# EAGLE board SteuerPlatine (EAGLE 8.5.0)
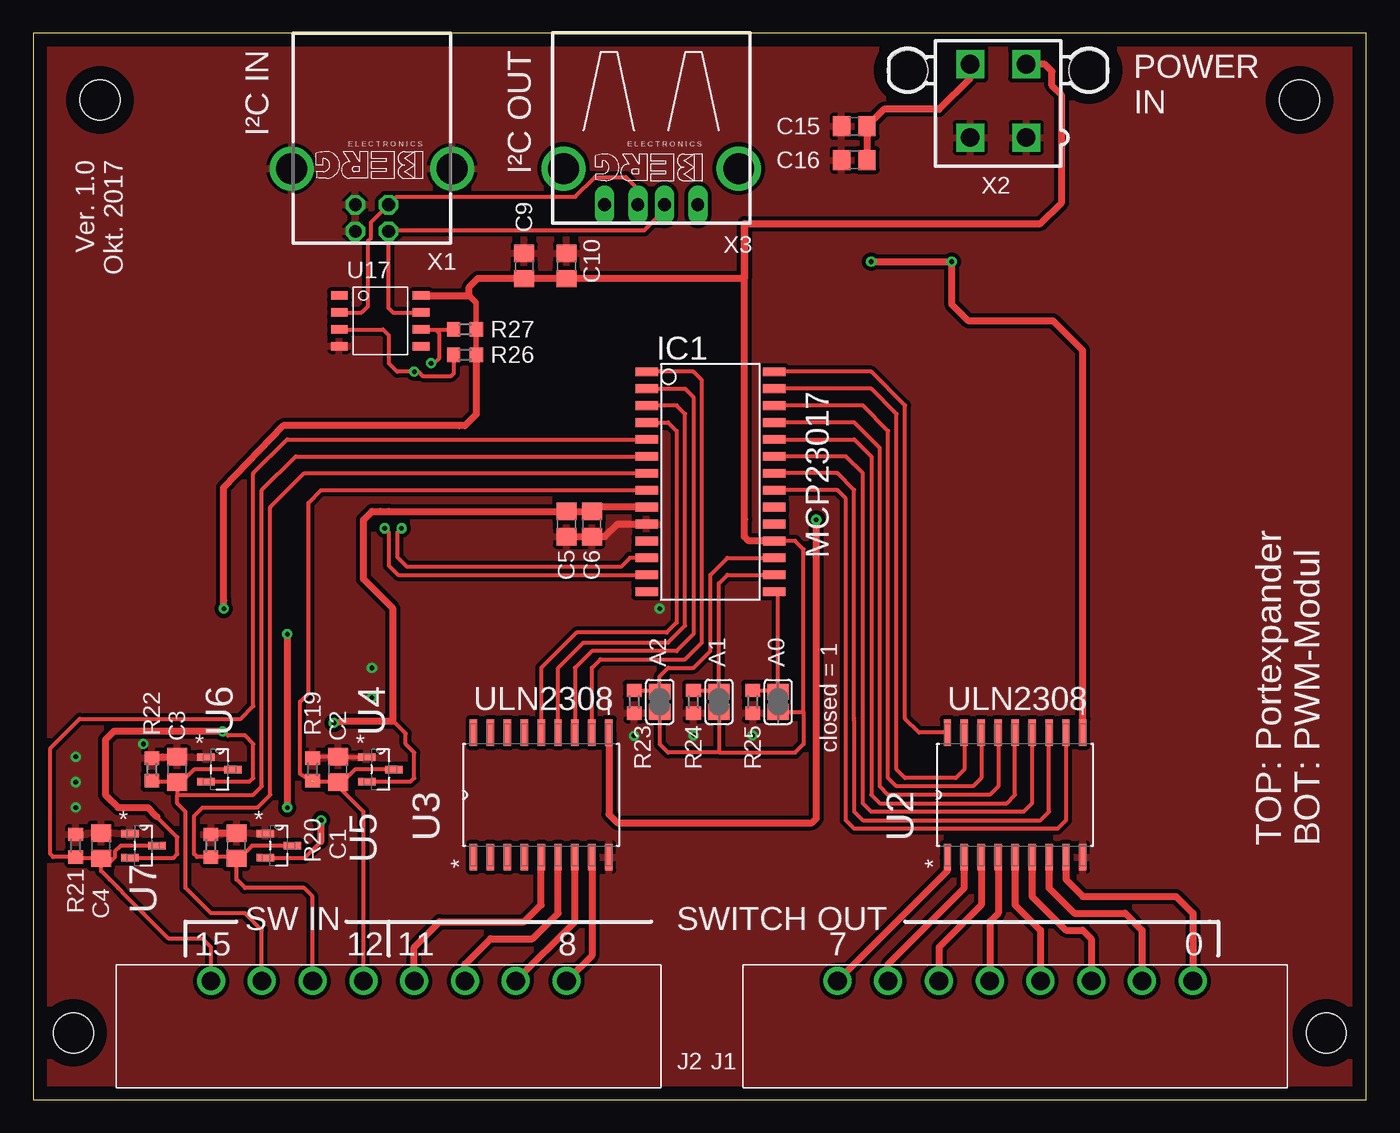
[diagram p0: board, top side]
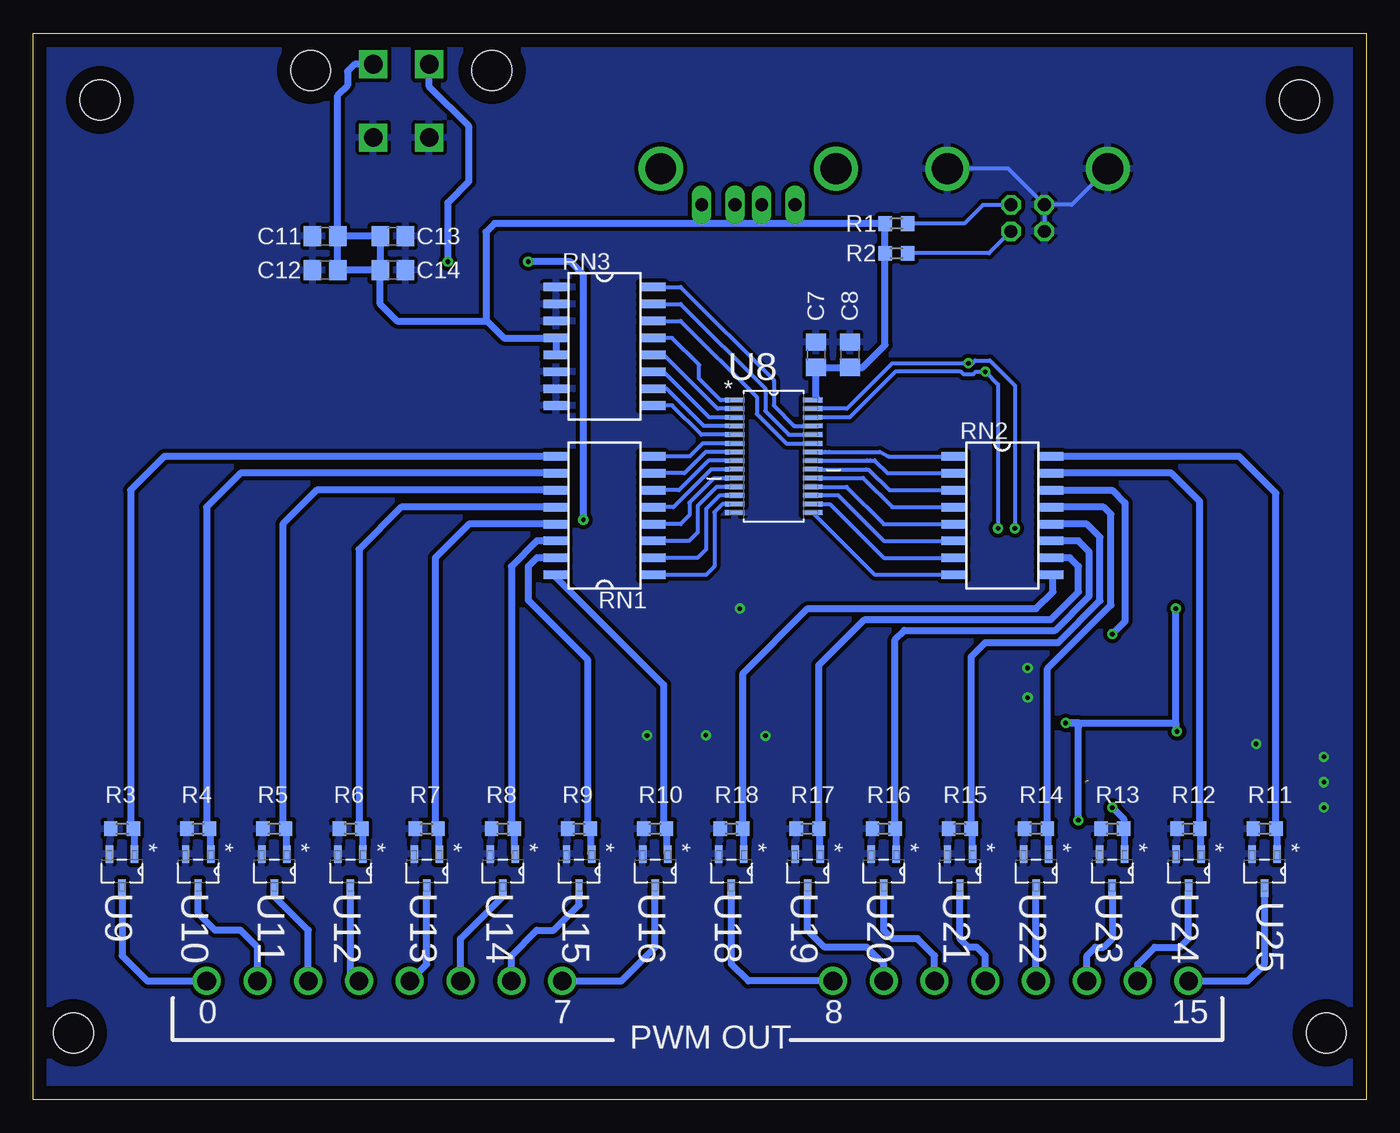
[diagram p1: board, bottom side, seen from below]

Size 100 x 80 mm. Coordinates in mm from the lower left corner, seen from the top.
Outline: 0,0 100,0 100,80 0,80 0,0
Copper layers (1*16): Top 0.035mm / dielectric 1.5mm / Bottom 0.035mm
Design rules "default *": minimum track width 6mil, minimum drill 0.35mm, track to track 12mil, track to pad 12mil, pad to pad 12mil, via to via 12mil, smd to smd 12mil, copper to edge 40mil, drill to drill 6mil, minimum pad ring 10mil, minimum via ring 8mil, stop-mask expansion 4mil, vias tented up to drill 0mil, thermal gap 10mil
Holes 3 mm at 5,75 3,5 95,75 97,5

## Footprints (pad centres in the part's own frame; a part is rotated, then mirrored left to right if it is on the bottom)
SJ = smd 1.168 x 1.6: 1 -0.762,0; 2 0.762,0
C0805 = smd 1.3 x 1.5: 1 -0.95,0; 2 0.95,0
SO28W = smd 0.65 x 1.7: 1 -7.62,-4.78; 2 -6.35,-4.78; 3 -5.08,-4.78; 4 -3.81,-4.78; 5 -2.54,-4.78; 6 -1.27,-4.78; 7 0,-4.78; 8 1.27,-4.78; 9 2.54,-4.78; 10 3.81,-4.78; 11 5.08,-4.78; 12 6.35,-4.78; 13 7.62,-4.78; 14 8.89,-4.78; 15 8.89,4.78; 16 7.62,4.78; 17 6.35,4.78; 18 5.08,4.78; 19 3.81,4.78; 20 2.54,4.78; 21 1.27,4.78; 22 0,4.78; 23 -1.27,4.78; 24 -2.54,4.78; 25 -3.81,4.78; 26 -5.08,4.78; 27 -6.35,4.78; 28 -7.62,4.78
691325310008 = drill 1.4: 1 -13.335,0; 2 -9.525,0; 3 -5.715,0; 4 -1.905,0; 5 1.905,0; 6 5.715,0; 7 9.525,0; 8 13.335,0
R0603 = smd 1 x 1.1: 1 -0.85,0; 2 0.85,0
SOMC16 = smd 1.91 x 0.64: 1 -3.62,4.445; 2 -3.62,3.175; 3 -3.62,1.905; 4 -3.62,0.635; 5 -3.62,-0.635; 6 -3.62,-1.905; 7 -3.62,-3.175; 8 -3.62,-4.445; 9 3.62,-4.445; 10 3.62,-3.175; 11 3.62,-1.905; 12 3.62,-0.635; 13 3.62,0.635; 14 3.62,1.905; 15 3.62,3.175; 16 3.62,4.445
SOIC127P1030X265-18N = smd 1.981 x 0.559: 1 -4.674,5.08; 2 -4.674,3.81; 3 -4.674,2.54; 4 -4.674,1.27; 5 -4.674,0; 6 -4.674,-1.27; 7 -4.674,-2.54; 8 -4.674,-3.81; 9 -4.674,-5.08; 10 4.674,-5.08; 11 4.674,-3.81; 12 4.674,-2.54; 13 4.674,-1.27; 14 4.674,0; 15 4.674,1.27; 16 4.674,2.54; 17 4.674,3.81; 18 4.674,5.08
SOT91P240X120-3N = smd 1.321 x 0.559: 1 -1.016,0.914; 2 -1.016,-0.914; 3 1.016,0
SOP65P640X110-28N = smd 1.473 x 0.356: 1 -2.921,4.216; 2 -2.921,3.581; 3 -2.921,2.921; 4 -2.921,2.286; 5 -2.921,1.626; 6 -2.921,0.965; 7 -2.921,0.33; 8 -2.921,-0.33; 9 -2.921,-0.965; 10 -2.921,-1.626; 11 -2.921,-2.286; 12 -2.921,-2.921; 13 -2.921,-3.581; 14 -2.921,-4.216; 15 2.921,-4.216; 16 2.921,-3.581; 17 2.921,-2.921; 18 2.921,-2.286; 19 2.921,-1.626; 20 2.921,-0.965; 21 2.921,-0.33; 22 2.921,0.33; 23 2.921,0.965; 24 2.921,1.626; 25 2.921,2.286; 26 2.921,2.921; 27 2.921,3.581; 28 2.921,4.216
SOT95P280X130-3N = smd 1.321 x 0.559: 1 -1.27,0.94; 2 -1.27,-0.94; 3 1.27,0
SOIC-8 = smd 1.27 x 0.635: 1 -3.073,1.905; 2 -3.073,0.635; 3 -3.073,-0.635; 4 -3.073,-1.905; 5 3.073,-1.905; 6 3.073,-0.635; 7 3.073,0.635; 8 3.073,1.905
PN61729-S = drill 0.95 octagon: 1 1.25,4.71; 2 -1.25,4.71; 3 -1.25,2.71; 4 1.25,2.71 | drill 2.3 pad 2.9: S1 -6.02,0; S2 6.02,0
5566-4 = drill 1.4 square: 1 2.1,-2.75; 2 -2.1,-2.75; 3 2.1,2.75; 4 -2.1,2.75 | hole 3: 6.8,2.29; -6.8,2.29
PN87520-S = drill 0.95 long: 1 -3.5,2.71; 2 -1,2.71; 3 1,2.71; 4 3.5,2.71 | drill 2.3 pad 2.9: S1 -6.57,0; S2 6.57,0

## Placement (x,y rotation side)
A0  [SJ]  55.88,29.84 270 top
A1  [SJ]  51.44,29.84 270 top
A2  [SJ]  46.99,29.84 270 top
C1  100nF  [C0805]  15.24,19.05 270 top
C2  100nF  [C0805]  22.86,24.77 270 top
C3  100nF  [C0805]  10.79,24.77 270 top
C4  100nF  [C0805]  5.08,19.05 270 top
C5  100nF  [C0805]  40.01,43.18 270 top
C6  10µF  [C0805]  41.91,43.18 270 top
C7  100nF  [C0805]  41.27,55.88 90 bottom
C8  10µF  [C0805]  38.73,55.88 90 bottom
C9  10µF  [C0805]  36.83,62.55 90 top
C10  100nF  [C0805]  40.01,62.55 90 top
C11  100nF  [C0805]  78.11,64.77 0 bottom
C12  100nF  [C0805]  78.11,62.23 0 bottom
C13  10µF  [C0805]  73.03,64.77 180 bottom
C14  10µF  [C0805]  73.03,62.23 180 bottom
C15  100nF  [C0805]  61.59,73.03 180 top
C16  10µF  [C0805]  61.59,70.48 180 top
IC1  MCP23017SO  [SO28W]  50.8,46.99 270 top
J1  [691325310008]  73.66,8.89 0 top
J2  [691325310008]  26.67,8.89 0 top
R1  [R0603]  35.24,65.72 0 bottom
R2  [R0603]  35.24,63.5 0 bottom
R3  [R0603]  93.34,20.32 0 bottom
R4  [R0603]  87.63,20.32 0 bottom
R5  [R0603]  81.92,20.32 0 bottom
R6  [R0603]  76.2,20.32 0 bottom
R7  [R0603]  70.48,20.32 0 bottom
R8  [R0603]  64.77,20.32 0 bottom
R9  [R0603]  59.05,20.32 0 bottom
R10  [R0603]  53.34,20.32 0 bottom
R11  [R0603]  7.62,20.32 0 bottom
R12  [R0603]  13.34,20.32 0 bottom
R13  [R0603]  19.05,20.32 0 bottom
R14  [R0603]  24.77,20.32 0 bottom
R15  [R0603]  30.48,20.32 0 bottom
R16  [R0603]  36.2,20.32 0 bottom
R17  [R0603]  41.91,20.32 0 bottom
R18  [R0603]  47.62,20.32 0 bottom
R19  3k  [R0603]  20.95,24.77 90 top
R20  3k  [R0603]  13.34,19.05 90 top
R21  3k  [R0603]  3.17,19.05 90 top
R22  3k  [R0603]  8.89,24.77 90 top
R23  3k  [R0603]  45.09,29.84 90 top
R24  3k  [R0603]  49.53,29.84 90 top
R25  3k  [R0603]  53.98,29.84 90 top
R26  [R0603]  32.38,55.88 0 top
R27  [R0603]  32.38,57.78 0 top
RN1  [SOMC16]  57.15,43.81 180 bottom
RN2  [SOMC16]  27.3,43.81 0 bottom
RN3  [SOMC16]  57.15,56.52 0 bottom
U2  ULN2803ADW  [SOIC127P1030X265-18N]  73.66,22.86 90 top
U3  ULN2803ADW  [SOIC127P1030X265-18N]  38.1,22.86 90 top
U4  BAV99  [SOT91P240X120-3N]  26.04,24.77 0 top
U5  BAV99  [SOT91P240X120-3N]  18.41,19.05 0 top
U6  BAV99  [SOT91P240X120-3N]  13.97,24.77 0 top
U7  BAV99  [SOT91P240X120-3N]  8.26,19.05 0 top
U8  PCA9635PW  [SOP65P640X110-28N]  44.45,48.26 0 bottom
U9  TSM2306CX  [SOT95P280X130-3N]  93.34,17.14 270 bottom
U10  TSM2306CX  [SOT95P280X130-3N]  87.63,17.14 270 bottom
U11  TSM2306CX  [SOT95P280X130-3N]  81.92,17.14 270 bottom
U12  TSM2306CX  [SOT95P280X130-3N]  76.2,17.14 270 bottom
U13  TSM2306CX  [SOT95P280X130-3N]  70.48,17.14 270 bottom
U14  TSM2306CX  [SOT95P280X130-3N]  64.77,17.14 270 bottom
U15  TSM2306CX  [SOT95P280X130-3N]  59.05,17.14 270 bottom
U16  TSM2306CX  [SOT95P280X130-3N]  53.34,17.14 270 bottom
U17  P82B715TD  [SOIC-8]  26.04,58.42 0 top
U18  TSM2306CX  [SOT95P280X130-3N]  47.62,17.14 270 bottom
U19  TSM2306CX  [SOT95P280X130-3N]  41.91,17.14 270 bottom
U20  TSM2306CX  [SOT95P280X130-3N]  36.2,17.14 270 bottom
U21  TSM2306CX  [SOT95P280X130-3N]  30.48,17.14 270 bottom
U22  TSM2306CX  [SOT95P280X130-3N]  24.77,17.14 270 bottom
U23  TSM2306CX  [SOT95P280X130-3N]  19.05,17.14 270 bottom
U24  TSM2306CX  [SOT95P280X130-3N]  13.34,17.14 270 bottom
U25  TSM2306CX  [SOT95P280X130-3N]  7.62,17.14 270 bottom
X1  PN61729-S  [PN61729-S]  25.4,69.85 180 top
X2  5566-4  [5566-4]  72.39,74.93 0 top
X3  PN87520-S  [PN87520-S]  46.35,69.85 180 top

## Library data of the parts
A0 A1 A2 = jumper
C1-C16 R1-R27 = resistor
IC1 = microchip; MF: MICROCHIP; MPN: MCP23017-E/SO; OC_FARNELL: 1332087; OC_NEWARK: 31K2958
J1 J2 = WR-TBL
RN1-RN3 = resistor-dil; OC_FARNELL: unknown; OC_NEWARK: unknown
U2 U3 = Texas Instruments_Farnell; MPN: ULN2803ADW; OC_FARNELL: 1652419; OC_NEWARK: 69K0711; PACKAGE: SOIC-18; SUPPLIER: TEXAS INSTRUMENTS
U4-U7 = Diodes_Farnell; MPN: BAV99; OC_FARNELL: 1902422; OC_NEWARK: -; PACKAGE: SOT-23-3; SUPPLIER: DIODES INC.
U8 = NXP_Farnell; MPN: PCA9635PW; OC_FARNELL: 1854073; OC_NEWARK: 30T3006; PACKAGE: TSSOP-28; SUPPLIER: NXP
U9-U16 U18-U25 = Taiwan_Farnell; MPN: TSM2306CX; OC_FARNELL: 1864577; OC_NEWARK: 27T2993; PACKAGE: SOT-23-3; SUPPLIER: TAIWAN SEMICONDUCTOR
U17 = Volks73-NXPSemiconductors; APPLICATIONS: I2C; CAPACITANCE-INPUT: 3000pF; CURRENT_SUPPLY: 22mA; DATA_RATE: 400kHz; DELAY_TIME: -; DESCRIPTION: IC REDRIVER I2C 1CH 400KHZ 8SO; DOCUMENTATION_LINK: <a href="http://www.nxp.com/documents/data_sheet/P82B715.pdf">Datasheet</a>; DOCUMENTATION_URL: http://www.nxp.com/documents/data_sheet/P82B715.pdf; INPUT: 2-Wire Buse; MANUFACTURER: NXP Semiconductors; NUMBER_OF_CHANNELS: 1; OPERATING_TEMPERATURE: -40C ~ 85C; OUTPUT: 2-Wire Bus; PART_NUMBER: P82B715TD,118; SIGNAL_CONDITIONING: -; SUPPLIER_ITEM_LINK: <a href="http://www.digikey.com/product-detail/en/P82B715TD,118/568-1007-2-ND/735621">Details</a>; SUPPLIER_ITEM_NUMBER: 568-1007-2-ND; SUPPLIER_ITEM_URL: http://www.digikey.com/product-detail/en/P82B715TD,118/568-1007-2-ND/735621; SUPPLIER_LINK: <a href="http://www.digikey.com">Home Page</a>; SUPPLIER_NAME: Digi-Key; SUPPLIER_URL: http://www.digikey.com; TYPE: Buffer, ReDriver; VOLTAGE_SUPPLY: 4.5V ~ 12V
X1 X3 = con-berg; OC_FARNELL: unknown; OC_NEWARK: unknown
X2 = con-molex; OC_FARNELL: unknown; OC_NEWARK: unknown

## Nets
+5V: A0.2 A1.2 A2.2 C5.1 C6.1 C7.1 C8.1 C9.1 C10.1 C11.2 C12.2 C13.2 C14.2 IC1.9 IC1.18 R1.1 R2.1 R26.2 R27.2 RN3.4 RN3.5 U4.2 U5.2 U6.2 U7.2 U8.28 U17.8 X2.3
+12V: C15.1 C16.1 U2.10 U3.10 X2.4
GND: C1.1 C2.1 C3.1 C4.1 C5.2 C6.2 C7.2 C8.2 C9.2 C10.2 C11.1 C12.1 C13.1 C14.1 C15.2 C16.2 IC1.10 R3.1 R4.1 R5.1 R6.1 R7.1 R8.1 R9.1 R10.1 R11.1 R12.1 R13.1 R14.1 R15.1 R16.1 R17.1 R18.1 R19.2 R20.2 R21.2 R22.2 R23.1 R24.1 R25.1 RN3.1 RN3.2 RN3.3 RN3.6 RN3.7 RN3.8 U2.9 U3.9 U4.1 U5.1 U6.1 U7.1 U8.14 U9.2 U10.2 U11.2 U12.2 U13.2 U14.2 U15.2 U16.2 U17.4 U18.2 U19.2 U20.2 U21.2 U22.2 U23.2 U24.2 U25.2 X1.1 X1.4 X1.S1 X1.S2 X2.1 X2.2
N$1: RN2.1 U8.22
N$2: RN2.2 U8.21
N$3: RN2.3 U8.20
N$4: RN2.4 U8.19
N$5: RN2.5 U8.18
N$6: RN2.6 U8.17
N$7: RN2.7 U8.16
N$8: RN2.8 U8.15
N$9: RN1.3 U8.11
N$10: RN1.2 U8.12
N$11: RN1.1 U8.13
N$12: RN1.4 U8.10
N$13: RN1.5 U8.9
N$14: RN1.6 U8.8
N$15: RN1.7 U8.7
N$16: RN1.8 U8.6
N$17: IC1.21 U2.11
N$18: IC1.22 U2.12
N$19: IC1.23 U2.13
N$20: IC1.24 U2.14
N$21: IC1.25 U2.15
N$22: IC1.26 U2.16
N$23: IC1.27 U2.17
N$24: IC1.28 U2.18
N$25: IC1.1 U3.11
N$26: IC1.2 U3.12
N$27: IC1.3 U3.13
N$28: IC1.4 U3.14
N$29: RN3.9 U8.5
N$30: RN3.16 U8.25
N$31: RN3.15 U8.24
N$32: RN3.10 U8.4
N$33: RN3.11 U8.3
N$34: RN3.12 U8.2
N$35: RN3.13 U8.1
N$36: RN3.14 U8.23
N$41: A2.1 IC1.17 R23.2
N$42: A1.1 IC1.16 R24.2
N$43: A0.1 IC1.15 R25.2
N$46: R2.2 U17.7 X1.2 X3.2
N$47: R1.2 U17.2 X1.3 X3.3
PWM1: R3.2 RN1.9 U9.1
PWM2: R4.2 RN1.10 U10.1
PWM3: R5.2 RN1.11 U11.1
PWM4: R6.2 RN1.12 U12.1
PWM5: R7.2 RN1.13 U13.1
PWM6: R8.2 RN1.14 U14.1
PWM7: R9.2 RN1.15 U15.1
PWM8: R10.2 RN1.16 U16.1
PWM9: R18.2 RN2.9 U18.1
PWM10: R17.2 RN2.10 U19.1
PWM11: R16.2 RN2.11 U20.1
PWM12: R15.2 RN2.12 U21.1
PWM13: R14.2 RN2.13 U22.1
PWM14: R13.2 RN2.14 U23.1
PWM15: R12.2 RN2.15 U24.1
PWM16: R11.2 RN2.16 U25.1
PWM-OUT1: J1.8 U2.8 U9.3
PWM-OUT2: J1.7 U2.7 U10.3
PWM-OUT3: J1.6 U2.6 U11.3
PWM-OUT4: J1.5 U2.5 U12.3
PWM-OUT5: J1.4 U2.4 U13.3
PWM-OUT6: J1.3 U2.3 U14.3
PWM-OUT7: J1.2 U2.2 U15.3
PWM-OUT8: J1.1 U2.1 U16.3
PWM-OUT9: J2.8 U3.8 U18.3
PWM-OUT10: J2.7 U3.7 U19.3
PWM-OUT11: J2.6 U3.6 U20.3
PWM-OUT12: J2.5 U3.5 U21.3
PWM-OUT13: C2.2 IC1.8 J2.4 R19.1 U4.3 U22.3
PWM-OUT14: C1.2 IC1.7 J2.3 R20.1 U5.3 U23.3
PWM-OUT15: C3.2 IC1.6 J2.2 R22.1 U6.3 U24.3
PWM-OUT16: C4.2 IC1.5 J2.1 R21.1 U7.3 U25.3
SCL: IC1.12 R26.1 U8.26 U17.3
SDA: IC1.13 R27.1 U8.27 U17.6

## Tracks (layer width: path | path; a pad name or v marks a point on that pad's centre or on a via)
+5V  (via drill 0.35)
  Top 0.152: 33.23,57.88 R27.2
  Top 0.305: IC1.18 57.15,41.91 57.78,41.27 57.78,29.02 | A2.2 46.99,26.67 47.62,26.04 51.5,26.04 | 51.5,26.04 57.15,26.04 57.78,26.67 57.78,29.02 | A1.2 51.44,26.1 51.5,26.04 | A0.2 57.72,29.08 57.78,29.02 | U5.2 20.36,18.14 21.59,19.37 | U7.2 10.52,18.14 10.79,18.41 10.79,19.68 9.27,21.21 | U6.2 16.23,23.85 16.51,24.13 16.51,26.67 15.88,27.3 14.61,27.3 14.29,27.62 | U4.2 28.3,23.85 28.57,24.13 28.57,26.04 27.94,26.67 27.94,27.46 26.99,28.41
  Top 0.406: R26.2 R27.2 33.23,59.79 32.7,60.33
  Top 0.508: IC1.9 42.23,44.45 C6.1 C5.1 26.67,44.13 26.04,44.13 25.4,44.13 24.77,43.5 24.77,39.05 26.99,36.83 26.99,28.41 | 26.99,28.41 26.99,28.4 | 26.99,28.4 26.99,28.41 | 26.99,28.41 26.99,28.4 | 26.99,28.4 26.99,28.41 | 21.59,19.37 v21.59,20.95 | v22.54,28.26 23.32,28.4 26.99,28.4 | X2.3 75.89,77.68 76.42,77.15 76.42,76.07 77.15,75.34 77.15,67.31 75.56,65.72 53.36,65.72 | 53.36,65.72 53.34,61.59 C10.1 C9.1 33.34,61.6 32.7,60.96 32.7,60.33 U17.8 | R26.2 33.22,51.41 32.38,50.56 31.96,50.56 18.75,50.56 14.28,45.91 14.29,37.48 v14.29,36.83 | 9.27,21.21 8.57,21.91 6.35,21.91 5.4,22.86 5.4,26.99 6.03,27.62 v14.2,27.62 14.29,27.62 | IC1.18 53.66,41.91 53.34,42.23 53.34,43.5 53.36,43.52 53.36,65.72
  Bottom 0.305: 41.27,52.73 U8.28
  Bottom 0.508: X2.3 75.89,77.68 76.42,77.15 76.42,76.07 77.16,75.34 C11.2 | 77.16,64.56 C12.2 C14.2 | 77.16,64.56 C11.2 | C14.2 C13.2 C11.2 | C11.2 77.16,64.56 | 65.96,58.42 72.71,58.42 73.98,59.69 C14.2 | 65.96,58.42 66.04,58.5 66.04,65.09 65.41,65.72 R1.1 R2.1 36.09,56.62 36.83,55.88 37.78,54.93 C8.1 C7.1 41.27,52.73 | v21.59,20.95 21.59,27.94 21.59,28.26 v22.54,28.26 21.6,28.25 14.29,28.25 | v14.2,27.62 14.29,27.71 14.29,28.25 | 14.29,28.25 v14.29,36.83 | RN3.5 RN3.4 64.69,57.15 65.96,58.42
+12V  (via drill 0.35)
  Top 0.508: U2.10 78.74,31.43 78.74,53.34 78.74,56.2 76.52,58.42 70.17,58.42 68.9,59.69 v68.9,62.87 v62.87,62.87 | U3.10 43.18,21.4 43.81,20.77 58.42,20.77 58.74,21.08 v58.74,43.5 | X2.4 70.29,76.64 67.94,74.3 63.81,74.3 C15.1 C16.1
  Bottom 0.508: v68.9,62.87 68.9,67.31 67.31,68.9 67.31,73.03 70.29,76 X2.4 | v58.74,43.5 58.74,61.91 59.69,62.87 v62.87,62.87
GND  (via drill 0.35)
  Top 0.305: U4.1 22.9,25.68 C2.1 21.05,25.71 R19.2
  Top 0.508: 42.87,42.23 C6.2 | 42.87,42.23 43.81,43.18 IC1.10 | C5.2 42.87,42.23 | R20.2 13.44,20 C1.1 | R22.2 8.99,25.71 C3.1
  Bottom 0.305: X1.S2 22.09,67.14 X1.4 | X1.4 X1.1 | X1.4 26.86,69.85 X1.S1
  other vias: 53.96,27.3 49.54,27.33 45.07,27.29 46.99,36.83 25.4,30.16 25.4,32.38 3.17,21.91 3.17,23.81 3.17,25.72 8.26,26.68
  pour Top: 0,-0.64 100.01,0 100.01,80.01 0,80.01
  pour Bottom: 0,0 100.01,0 100.01,80.01 0,80.01
N$1
  Bottom 0.305: U8.22 40.6,48.59 40.3,48.59 36.5,48.59 35.87,48.26 RN2.1
N$2
  Bottom 0.305: U8.21 41.5,47.95 37.43,47.95 37.2,47.95 36.88,47.95 35.92,46.99 RN2.2
N$3
  Bottom 0.305: U8.20 41.51,47.27 37.52,47.27 37.33,47.26 35.76,45.72 RN2.3
N$4
  Bottom 0.305: U8.19 37.74,46.63 35.56,44.45 RN2.4
N$5
  Bottom 0.305: U8.18 38.99,45.97 36.2,43.18 RN2.5
N$6
  Bottom 0.305: U8.17 39.62,45.34 36.2,41.91 RN2.6
N$7
  Bottom 0.305: U8.16 40.23,44.68 36.2,40.64 RN2.7
N$8
  Bottom 0.305: RN2.8 36.85,39.37 U8.15
N$9
  Bottom 0.305: U8.11 48.73,45.97 50.16,44.53 50.16,42.55 50.8,41.91 RN1.3
N$10
  Bottom 0.305: U8.12 47.4,45.31 48.52,45.31 49.53,44.31 49.53,41.27 50.16,40.64 RN1.2
N$11
  Bottom 0.305: U8.13 48.3,44.68 48.9,44.08 48.9,40.01 49.53,39.37 RN1.1
N$12
  Bottom 0.305: U8.10 47.4,46.61 48.95,46.61 50.77,44.79 50.77,43.84 51.44,43.18 RN1.4
N$13
  Bottom 0.305: U8.9 47.4,47.27 49.16,47.27 51.97,44.45 RN1.5
N$14
  Bottom 0.305: RN1.6 51.57,45.72 49.36,47.93 U8.8
N$15
  Bottom 0.305: U8.7 47.4,48.56 49.58,48.56 51.16,46.99 RN1.7
N$16
  Bottom 0.305: RN1.8 50.75,48.26 49.78,49.23 U8.6
N$17
  Top 0.305: U2.11 77.47,20.95 76.83,20.32 61.59,20.32 60.96,20.95 60.96,45.09 60.33,45.72 IC1.21
N$18
  Top 0.305: U2.12 76.2,21.59 75.56,20.95 62.23,20.95 61.57,21.61 61.57,28.42 61.57,28.6 61.57,45.74 60.33,46.99 IC1.22
N$19
  Top 0.305: U2.13 74.93,22.23 74.3,21.59 62.87,21.59 62.23,22.23 62.23,46.99 60.96,48.26 IC1.23
N$20
  Top 0.305: IC1.24 61.59,49.53 62.87,48.26 62.87,22.86 63.5,22.23 73.03,22.23 73.66,22.86 U2.14
N$21
  Top 0.305: U2.15 72.39,23.5 71.75,22.86 64.14,22.86 63.5,23.5 63.5,48.9 61.59,50.8 IC1.25
N$22
  Top 0.305: U2.16 71.12,24.13 70.48,23.5 64.77,23.5 64.14,24.13 64.14,50.16 62.23,52.07 IC1.26
N$23
  Top 0.305: U2.17 69.85,24.77 69.22,24.13 65.41,24.13 64.77,24.77 64.77,51.44 62.87,53.34 IC1.27 | IC1.27 55.24,53.34 IC1.27
N$24
  Top 0.305: U2.18 66.45,27.53 65.41,28.57 65.41,52.07 62.87,54.61 IC1.28
N$25
  Top 0.305: U3.11 41.91,32.38 42.55,33.02 48.9,33.02 50.16,34.29 50.16,53.98 49.53,54.61 IC1.1
N$26
  Top 0.305: IC1.2 48.9,53.34 49.53,52.7 49.53,34.92 48.26,33.66 41.91,33.66 40.64,32.38 U3.12
N$27
  Top 0.305: U3.13 39.37,32.38 41.27,34.29 47.62,34.29 48.9,35.56 48.9,51.44 48.26,52.07 IC1.3
N$28
  Top 0.305: IC1.4 47.62,50.8 48.26,50.16 48.26,35.79 47.51,35.04 40.75,35.04 38.1,32.38 U3.14
N$29
  Bottom 0.305: U8.5 49.89,49.89 52.07,52.07 RN3.9
N$30
  Bottom 0.305: RN3.16 51.44,60.96 44.45,53.98 44.45,52.07 42.93,50.55 U8.25
N$31
  Bottom 0.305: RN3.15 51.44,59.69 45.09,53.34 45.09,51.66 43.31,49.89 U8.24
N$32
  Bottom 0.305: U8.4 49.68,50.55 52.48,53.34 RN3.10
N$33
  Bottom 0.305: U8.3 49.28,51.18 52.7,54.61 RN3.11
N$34
  Bottom 0.305: U8.2 48.67,51.84 52.7,55.88 RN3.12
N$35
  Bottom 0.305: U8.1 48.44,52.48 50.05,54.09 50.05,55.13 52.07,57.15 RN3.13
N$36
  Bottom 0.305: RN3.14 51.44,58.42 45.72,52.7 45.72,51.44 43.51,49.23 U8.23
N$41
  Top 0.152: 46.9,30.7 A2.1
  Top 0.305: IC1.17 52.07,40.64 50.8,39.37 50.8,33.66 49.53,32.38 47.62,32.38 46.99,31.75 A2.1 | R23.2 46.9,30.7
N$42
  Top 0.305: IC1.16 52.07,39.37 51.44,38.73 51.44,33.66 51.44,33.02 A1.1 51.35,30.7 R24.2
N$43
  Top 0.305: IC1.15 55.47,37.99 55.88,38.22 A0.1 55.79,30.7 R25.2
N$46
  Top 0.152: 26.93,59.11 26.99,59.05
  Top 0.305: 26.93,59.11 26.65,59.39 X1.2 26.73,65.22 45.85,65.22 47.35,66.73 X3.2 | 26.99,59.05 U17.7
  Bottom 0.305: X1.2 28.29,63.5 R2.2
N$47
  Top 0.305: U17.2 24.63,59.05 25.08,59.51 25.08,64.39 25.34,64.65 25.34,65.83 X1.3 27.25,67.73 40.66,67.73 42.14,69.22 44.45,69.22 45.35,68.31 X3.3
  Bottom 0.305: X1.3 26.67,67.12 28.77,67.12 30.16,65.72 R1.2
PWM1
  Bottom 0.508: RN1.9 90.17,48.26 92.71,45.72 92.71,20.54 92.61,20.43 | 92.61,20.43 R3.2 | U9.1 92.41,20.23 92.61,20.43
PWM2
  Bottom 0.508: RN1.10 84.45,46.99 87,44.45 87,20.54 R4.2 86.69,20.23 U10.1
PWM3
  Bottom 0.508: RN1.11 78.74,45.72 81.28,43.18 81.28,20.54 R5.2 80.97,20.23 U11.1
PWM4
  Bottom 0.508: RN1.12 72.39,44.45 75.56,41.27 75.56,20.54 R6.2 75.26,20.23 U12.1
PWM5
  Bottom 0.508: RN1.13 67.31,43.18 69.85,40.64 69.85,20.54 R7.2 69.55,20.23 U13.1
PWM6
  Bottom 0.508: RN1.14 62.23,41.91 64.14,40.01 64.14,20.54 R8.2 63.92,18.5 U14.1
PWM7
  Bottom 0.508: RN1.15 62.23,40.64 62.87,40.01 62.87,37.47 61.59,36.2 59.05,33.66 58.42,33.02 58.42,20.54 R9.2 58.2,18.5 U15.1
PWM8
  Bottom 0.508: RN1.16 60.96,39.37 59.69,38.1 52.7,31.11 52.7,20.54 R10.2 52.49,18.5 U16.1
PWM9
  Bottom 0.508: U18.1 46.69,20.23 R18.2 46.77,31.96 41.91,36.83 24.77,36.83 23.5,38.1 23.5,39.18 RN2.9
PWM10
  Bottom 0.508: U19.1 40.97,20.23 R17.2 41.06,32.6 37.64,36.02 23.67,36.02 21.59,38.1 21.59,40.01 22.23,40.64 RN2.10
PWM11
  Bottom 0.508: U20.1 35.26,20.23 R16.2 35.34,34.51 34.65,35.2 23.34,35.2 20.78,37.76 20.78,41.1 21.59,41.91 RN2.11
PWM12
  Bottom 0.508: U21.1 29.54,20.23 R15.2 29.63,33.23 28.57,34.29 23.1,34.29 19.96,37.43 19.96,42.19 20.95,43.18 RN2.12
PWM13
  Bottom 0.508: U22.1 23.82,20.23 R14.2 23.91,32.33 19.15,37.09 19.15,43.92 19.68,44.45 RN2.13
PWM14  (via drill 0.35)
  Top 0.508: v19.05,34.92 v19.05,21.91
  Bottom 0.508: U23.1 18.11,20.23 R13.2 18.2,21.06 v19.05,21.91 | RN2.14 19.05,45.72 18.1,44.77 18.1,35.88 v19.05,34.92
PWM15
  Bottom 0.508: U24.1 12.39,20.23 R12.2 12.48,44.87 14.61,46.99 RN2.15 | RN2.15 24.13,46.99 RN2.15
PWM16
  Bottom 0.508: U25.1 6.68,20.23 R11.2 6.77,45.51 9.53,48.26 RN2.16
PWM-OUT1
  Top 0.508: U2.8 77.47,16.51 78.74,15.24 85.72,15.24 87,13.97 J1.8
  Bottom 0.508: U9.3 93.34,10.79 91.44,8.89 J1.8
PWM-OUT2
  Top 0.508: U2.7 76.2,15.88 78.11,13.97 81.92,13.97 83.19,12.7 J1.7
  Bottom 0.508: J1.7 83.19,11.43 84.45,12.7 86.36,12.7 87.63,13.97 U10.3
PWM-OUT3
  Top 0.508: U2.6 74.93,15.24 77.47,12.7 78.74,12.7 79.38,12.06 J1.6
  Bottom 0.508: J1.6 79.38,12.7 81.92,15.24 U11.3
PWM-OUT4
  Top 0.508: U2.5 73.66,14.61 75.56,12.7 J1.5
  Bottom 0.508: J1.5 76.2,9.53 U12.3
PWM-OUT5
  Top 0.508: U2.4 72.39,13.97 71.75,13.34 J1.4
  Bottom 0.508: J1.4 70.48,10.16 U13.3
PWM-OUT6
  Top 0.508: U2.3 71.12,14.61 67.94,11.43 J1.3
  Bottom 0.508: J1.3 67.94,12.06 64.77,15.24 U14.3
PWM-OUT7
  Top 0.508: J1.2 64.14,10.16 69.85,15.88 U2.2
  Bottom 0.508: J1.2 64.14,10.79 62.23,12.7 60.96,12.7 59.05,14.61 U15.3
PWM-OUT8
  Top 0.508: U2.1 68.58,17.14 J1.1
  Bottom 0.508: U16.3 53.34,11.43 55.88,8.89 J1.1
PWM-OUT9
  Top 0.508: U3.8 41.91,10.79 J2.8
  Bottom 0.508: J2.8 46.35,8.89 47.62,10.16 U18.3
PWM-OUT10
  Top 0.508: U3.7 40.64,13.34 J2.7
  Bottom 0.508: J2.7 36.2,10.16 37.47,11.43 40.64,11.43 41.91,12.7 U19.3
PWM-OUT11
  Top 0.508: J2.6 32.38,10.16 34.29,12.06 37.47,12.06 39.37,13.97 U3.6
  Bottom 0.508: J2.6 32.38,10.79 33.66,12.06 35.56,12.06 36.2,12.7 U20.3
PWM-OUT12
  Top 0.508: U3.5 38.1,14.61 36.83,13.34 30.48,13.34 28.57,11.43 J2.5
  Bottom 0.508: J2.5 28.57,10.79 29.21,11.43 29.84,11.43 30.48,12.06 U21.3
PWM-OUT13  (2 unrouted)
  Top 0.305: 22.85,23.82 C2.2 23.18,24.13 23.5,24.13 24.13,24.77 U4.3 | 22.85,23.82 21.05,23.82 | 20.85,23.91 20,24.45 20,29.84 20.64,30.48 20.64,44.77 21.59,45.72 IC1.8 | 22.85,23.82 22.86,23.8 22.86,23.5 24.77,21.59 J2.4
  Bottom 0.508: J2.4 U22.3
PWM-OUT14
  Top 0.305: J2.3 20.95,15.24 20.32,15.88 15.88,15.88 15.24,16.51 C1.2 | C1.2 15.46,18.1 16.41,19.05 U5.3 | 15.18,18.16 15.14,18.2 R20.1 12.28,18.2 12.06,18.41 12.06,21.27 12.7,21.91 16.83,21.91 17.78,22.86 17.78,44.45 20.32,46.99 IC1.7 | 15.18,18.16 C1.2 | C1.2 15.18,18.16
  Bottom 0.508: J2.3 20.95,10.79 20.32,11.43 19.68,11.43 19.05,12.06 U23.3
PWM-OUT15
  Top 0.305: J2.2 17.14,12.7 15.88,13.97 13.34,13.97 11.43,15.88 11.43,21.59 10.79,22.23 10.79,22.86 | IC1.6 19.68,48.26 17.14,45.72 17.14,23.5 16.51,22.86 10.79,22.86 | C3.2 10.74,23.82 | 10.74,23.82 8.99,23.82 R22.1 | 10.79,23.72 10.79,22.86 | 10.79,23.72 10.79,23.77 10.74,23.82 | U6.3 12.06,24.77 11.43,24.13 11.21,24.13 10.79,23.72
  Bottom 0.508: J2.2 17.14,10.16 15.88,11.43 13.97,11.43 13.34,12.06 U24.3
PWM-OUT16
  Top 0.305: J2.1 13.34,11.43 12.7,12.06 10.16,12.06 8.26,13.97 6.99,15.24 6.35,15.88 5.71,16.51 5.08,17.14 5.08,18.09 5.07,18.1 | 5.07,18.1 C4.2 5.12,18.14 5.47,17.78 5.71,17.78 6.12,18.19 6.12,18.6 6.57,19.05 U7.3 | 5.07,18.1 3.27,18.1 R21.1 1.49,18.2 1.27,18.41 1.27,26.35 3.49,28.57 15.56,28.57 16.51,29.53 16.51,46.99 19.05,49.53 IC1.5
  Bottom 0.508: J2.1 8.89,8.89 7.62,10.16 U25.3
SCL  (via drill 0.35)
  Top 0.152: U17.3 23.01,57.78 | v28.57,54.61 v28.58,54.61
  Top 0.305: 23.01,57.78 26.24,57.78 26.67,57.35 26.67,55.24 27.3,54.61 v28.58,54.61 28.89,54.61 29.21,54.29 31.35,54.29 31.54,54.48 R26.1 | v27.62,42.86 27.3,42.55 27.3,40.7 28,40.01 44.13,40.01 44.77,40.64 IC1.12
  Bottom 0.305: U8.26 38.76,51.18 35.33,54.61 30.39,54.61 30.19,54.41 29.5,54.41 29.3,54.61 v28.58,54.61 27.62,53.65 v27.62,42.86
SDA  (via drill 0.35)
  Top 0.152: 30.16,57.78 U17.6 | 30.19,57.76 30.16,57.78 | R27.1 30.16,57.78
  Top 0.305: v29.84,55.24 30.08,55.24 30.48,55.65 30.48,57.47 30.19,57.76 | U17.6 R27.1 | v26.35,42.86 26.66,42.55 26.66,40.07 27.36,39.37 IC1.13
  Bottom 0.305: U8.27 38.96,51.84 35.56,55.24 v29.84,55.24 29.68,55.09 29.55,55.22 29.32,55.45 28.23,55.45 26.35,53.56 v26.35,42.86

## Text on the board
tPlace: 15 | 12 | 11 | 8 | 7 | 0
tNames: I²C IN | I²C OUT | POWER / IN | Ver. 1.0 / Okt. 2017 | MCP23017 | ULN2308 | ULN2308 | closed = 1 | TOP: Portexpander / BOT: PWM-Modul | SW IN | SWITCH OUT
bNames: 15 | 8 | 7 | 0 | PWM OUT